# Altium PCB x-IMU3-SA-AX.PcbDoc
Units mm, origin at the board's own origin, x right, y up, seen from the top; angles counter-clockwise.
Board outline 27 x 16 mm, 4 copper layers (Top Layer, Int1 (GND), Int2 (PWR), Bottom Layer), stack 1.369 mm thick; 20 components, 29 nets, 136 pads, 44 vias.
Unrouted connection lines stored in the file: 3.
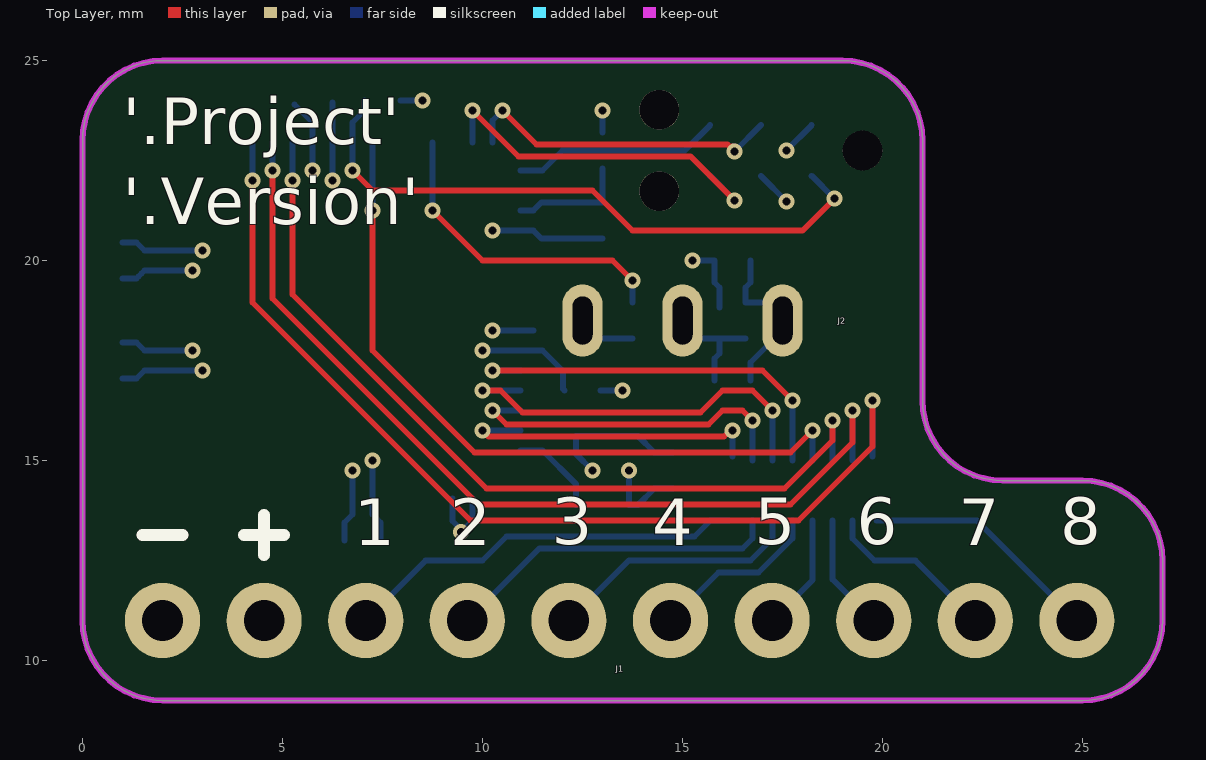
[diagram p0: Top Layer view]
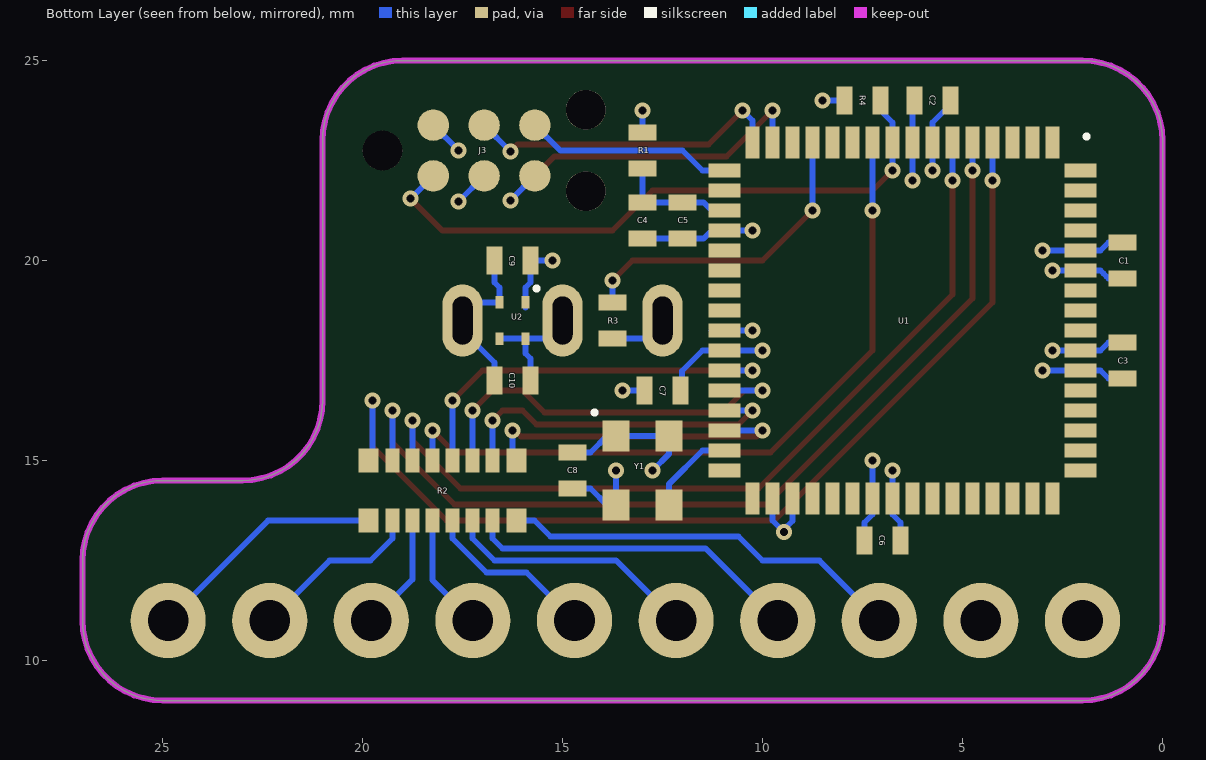
[diagram p1: Bottom Layer view, seen from below]
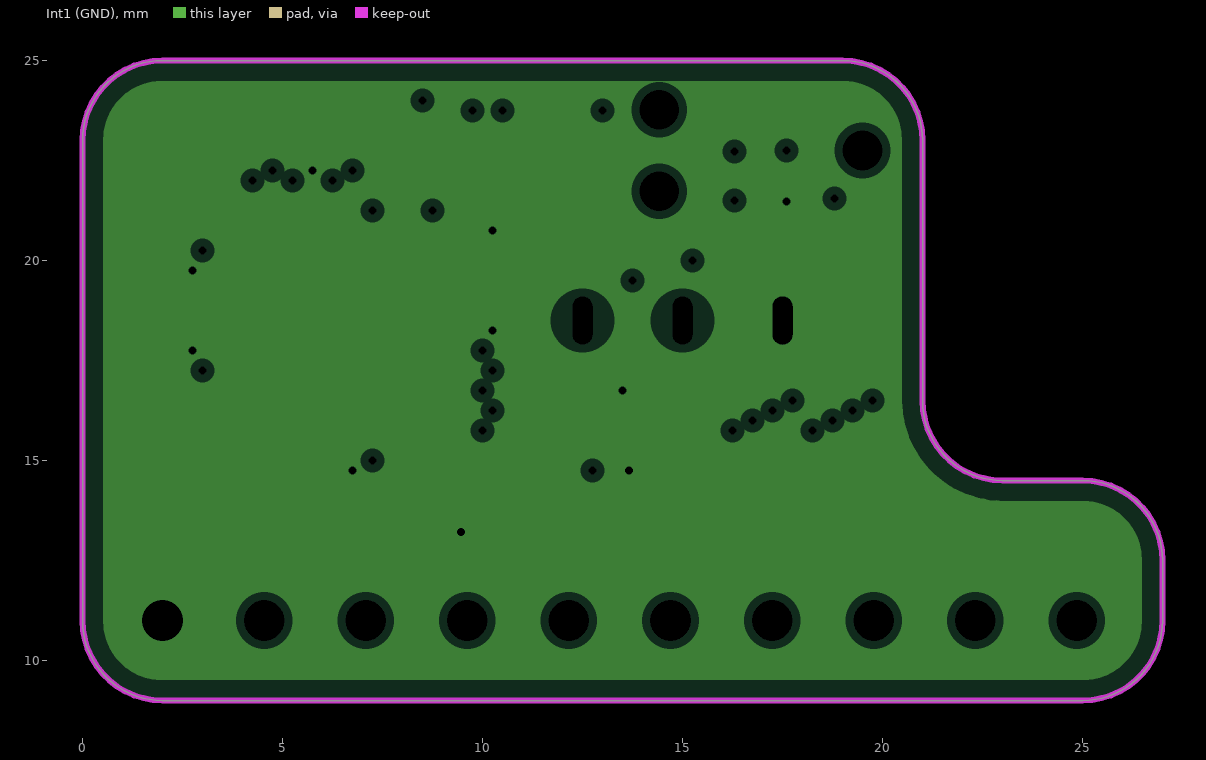
[diagram p2: Int1 (GND), clearances drawn from the general rule]
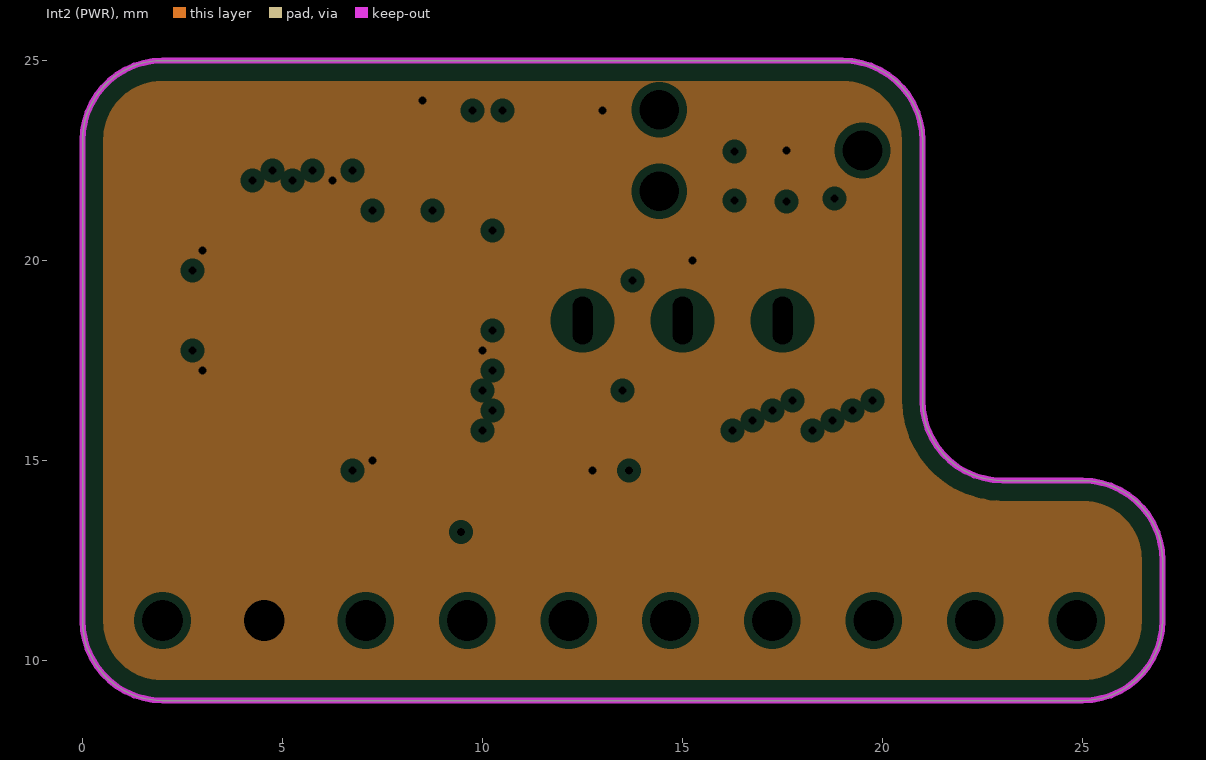
[diagram p3: Int2 (PWR), clearances drawn from the general rule]
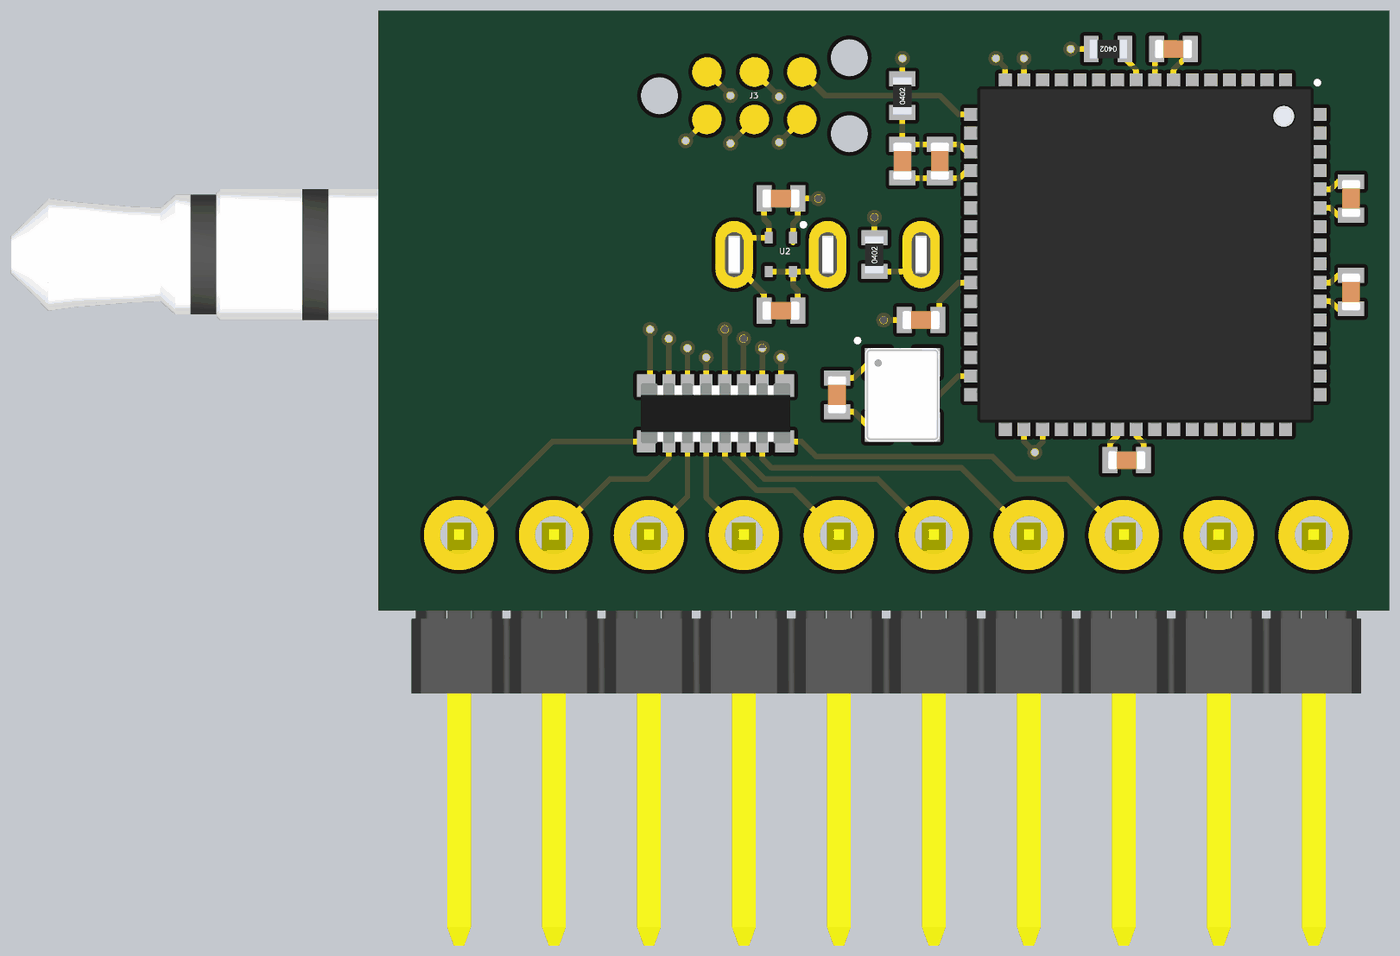
[diagram p4: 3D render of the assembled board from below, using the file's embedded part models]

## Layer stack, top to bottom
Top Solder: solder mask 0.0254, SM-001, Dk 4
Top Layer: signal copper 0.035
Dielectric 1: prepreg 0.1295, PP-017, Dk 4.3
Dielectric 2: prepreg 0.1295, PP-017, Dk 4.3
Int1 (GND): plane copper 0.035, net GND
Dielectric 3: core 0.7112, Core-039, Dk 4.8
Int2 (PWR): plane copper 0.035, net VDD
Dielectric 4: prepreg 0.1295, PP-017, Dk 4.3
Dielectric 5: prepreg 0.1295, PP-017, Dk 4.3
Bottom Layer: signal copper 0.035
Bottom Solder: solder mask 0.0254, SM-001, Dk 4

## Board outline
0,11 0,23 cw(c2,23) 2,25 19,25 cw(c19,23) 21,23 21,16.5 ccw(c23,16.5) 23,14.5 25,14.5 cw(c25,12.5) 27,12.5 27,11 cw(c25,11) 25,9 2,9 cw(c2,11)

## Design rules (kind name [scope] priority, off if disabled: settings)
Clearance [All] p1: gap=0.1 ignorepadtopadclearanceinfootprint=FALSE except(0: Arc-Hole Track-Hole SMDPad-Hole THPad-Hole Via-Hole Fill-Hole Poly-Hole Region-Hole Text-Hole)
DiffPairsRouting [All] p1: maxlimit=0.254 minlimit=0.1 mostfreqgap=0.1 toplayer_minwidth=0.1 toplayer_maxwidth=0.381 toplayer_prefwidth=0.1 bottomlayer_minwidth=0.1 bottomlayer_maxwidth=0.381 bottomlayer_prefwidth=0.1 maxuncoupledlength=12.7
HoleSize [All] p1: absolutevalues=TRUE maxlimit=10 minlimit=0.025 maxpercent=80.000 minpercent=20.000
MinimumSolderMaskSliver [All] p1: minsoldermaskwidth=0
PlaneClearance [All] p1: clearance=0.2
PlaneConnect [All] p1: planeconnectstyle=Direct reliefexpansion=0.508 reliefentries=4 reliefconductorwidth=0.254 reliefairgap=0.254
PolygonConnect [All] p1: thpad.connectstyle=Relief thpad.reliefconductorwidth=0.254 thpad.reliefentries=4 thpad.polygonreliefangle="90 Angle" thpad.airgapwidth=0.1 smdpad.connectstyle=Relief smdpad.reliefconductorwidth=0.254 smdpad.reliefentries=4 smdpad.polygonreliefangle="90 Angle" smdpad.airgapwidth=0.1 via.connectstyle=Direct via.reliefconductorwidth=0.254 via.reliefentries=4 via.polygonreliefangle="90 Angle" via.airgapwidth=0.254
RoutingVias [All] p1: holewidth=0.711 width=1.27 viastyle="Through Hole" minholewidth=0.2 minwidth=0.4 maxholewidth=0.711 maxwidth=1.27
SilkToSolderMaskClearance [IsPad] p1: minsilkscreentomaskgap=0.1 clearancetoexposedcopper=TRUE
SolderMaskExpansion [All] p1: expansion=0.102 istentingtop=FALSE
SupplyNets "Schematic Supply Nets_2" [InNet('GND')] p1: voltage=0.000
SupplyNets "Schematic Supply Nets_1" [InNet('VIN')] p2: voltage=0.000
SupplyNets "Schematic Supply Nets" [InNet('VDD')] p3: voltage=0.000
Width [All] p1: maxlimit=1 minlimit=0.1 preferedwidth=0.1
24 further rules are at their usual default settings.

## Components (designator, comment, footprint, x,y, rotation, side; value= is the part's Value field where it differs from the comment)
C1 "100nF" "Capacitor 0402" 1,20 r90 bottom
C2 "100nF" "Capacitor 0402" 5.75,24 r180 bottom
C3 "100nF" "Capacitor 0402" 1,17.5 r90 bottom
C4 "10uF" "Capacitor 0402" 13,21 r90 bottom
C5 "100nF" "Capacitor 0402" 12,21 r90 bottom
C6 "100nF" "Capacitor 0402" 7,13 r180 bottom
C7 "100nF" "Capacitor 0402" 12.5,16.75 r0 bottom
C8 "100nF" "Capacitor 0402" 14.75,14.75 r90 bottom
C9 "10uF" "Capacitor 0402" 16.25,20 r180 bottom
C10 "10uF" "Capacitor 0402" 16.25,17 r180 bottom
J1 "Molex 90121-0770" "Molex 90121-0770" 2,11 r90 top
J2 "SP-3533-02" SP-3533-02 15,18.5 r180 top
J3 "DNP" "Tag Connect No Legs" 19.5,22.75 r180 bottom
R1 "33R" "Resistor 0402" 13,22.75 r90 bottom
R2 "YC248-FR-07220RL" YC248 18,14.25 r270 bottom
R3 "470R" "Resistor 0402" 13.75,18.5 r90 bottom
R4 "10kR" "Resistor 0402" 7.5,24 r0 bottom
U1 "PIC32MZ0512EFE064-I/MR" QFN-64 6.5,18.5 r270 bottom
U2 "LP5907SNX-3.0" X2SON 16.25,18.5 r270 bottom
Y1 "ECS-2520MV-240-BN-TR" "ECS 2x2.5mm" 13,14.75 r270 bottom

## Footprints (in the part's own frame and the unit in brackets; to place one, negate y for a bottom-side part, rotate by r counter-clockwise, add the part's x,y. Pads: shape width x height; smd on the part's side, far side on the other; paste and mask are expansions set on the pad)
"Capacitor 0402" [mm]
  rect 0.4x0.7 smd: 1(-0.45,0) 2(0.45,0)
  body extent -0.5,-0.25 0.5,0.25, height 0.48
"ECS 2x2.5mm" [mm]
  rect 0.78x0.68 smd: 1(-0.865,-0.665) 2(0.865,-0.665) 3(0.865,0.665) 4(-0.865,0.665)
  silkscreen extent -1.5,-1.25 -1.4,-1.15, body extent -1.25,-1 1.25,1, height 0.82
"Molex 90121-0770" [mil]
  round 74 hole 40: 1(0,0) 2(0,-100) 3(0,-200) 4(0,-300) 5(0,-400) 6(0,-500) 7(0,-600) 8(0,-700) 9(0,-800) 10(0,-900)
  body extent -433,-950 13,50, height 142
QFN-64 [mm]
  rect 0.8x0.35 smd: 1(-4.45,3.75) 2(-4.45,3.25) 3(-4.45,2.75) 4(-4.45,2.25) 5(-4.45,1.75) 6(-4.45,1.25) 7(-4.45,0.75) 8(-4.45,0.25) 9(-4.45,-0.25) 10(-4.45,-0.75) 11(-4.45,-1.25) 12(-4.45,-1.75) 13(-4.45,-2.25) 14(-4.45,-2.75) 15(-4.45,-3.25) 16(-4.45,-3.75) 33(4.45,-3.75) 34(4.45,-3.25) 35(4.45,-2.75) 36(4.45,-2.25) 37(4.45,-1.75) 38(4.45,-1.25) 39(4.45,-0.75) 40(4.45,-0.25) 41(4.45,0.25) 42(4.45,0.75) 43(4.45,1.25) 44(4.45,1.75) 45(4.45,2.25) 46(4.45,2.75) 47(4.45,3.25) 48(4.45,3.75)
  rect 0.35x0.8 smd: 17(-3.75,-4.45) 18(-3.25,-4.45) 19(-2.75,-4.45) 20(-2.25,-4.45) 21(-1.75,-4.45) 22(-1.25,-4.45) 23(-0.75,-4.45) 24(-0.25,-4.45) 25(0.25,-4.45) 26(0.75,-4.45) 27(1.25,-4.45) 28(1.75,-4.45) 29(2.25,-4.45) 30(2.75,-4.45) 31(3.25,-4.45) 32(3.75,-4.45) 49(3.75,4.45) 50(3.25,4.45) 51(2.75,4.45) 52(2.25,4.45) 53(1.75,4.45) 54(1.25,4.45) 55(0.75,4.45) 56(0.25,4.45) 57(-0.25,4.45) 58(-0.75,4.45) 59(-1.25,4.45) 60(-1.75,4.45) 61(-2.25,4.45) 62(-2.75,4.45) 63(-3.25,4.45) 64(-3.75,4.45)
  silkscreen extent -4.65,4.55 -4.55,4.65, body extent -4.52,-4.52 4.52,4.52, height 0.9
"Resistor 0402" [mm]
  rect 0.4x0.7 smd: 1(-0.45,0) 2(0.45,0)
  body extent -0.51,-0.25 0.49,0.25, height 0.34
SP-3533-02 [mm]
  oval 1x1.8 hole 0.5 slot 1.2 at 90 deg: R(0,0) S(-2.5,0) T(2.5,0)
  body extent -21.85,-2.5 4.75,2.5, height 5
"Tag Connect No Legs" [mil]
  round 31 smd paste-99999: 1(50,-25) 2(50,25) 3(100,-25) 4(100,25) 5(150,-25) 6(150,25)
  round 39 hole 39 unplated: Pin(0,0) Pin(200,-40) Pin(200,40)
X2SON [mm]
  rect 0.31x0.21 smd: 1(-0.455,0.325) 2(-0.455,-0.325) 3(0.455,-0.325) 4(0.455,0.325)
  silkscreen extent -0.85,0.55 -0.75,0.65, body extent -0.5,-0.5 0.5,0.5, height 0.4
YC248 [mm]
  rect 0.6x0.5 smd: 1(-0.75,1.85) 8(-0.75,-1.85) 9(0.75,-1.85) 16(0.75,1.85)
  rect 0.6x0.35 smd: 2(-0.75,1.25) 3(-0.75,0.75) 4(-0.75,0.25) 5(-0.75,-0.25) 6(-0.75,-0.75) 7(-0.75,-1.25) 10(0.75,-1.25) 11(0.75,-0.75) 12(0.75,-0.25) 13(0.75,0.25) 14(0.75,0.75) 15(0.75,1.25)
  body extent -0.8,-2 0.8,2, height 0.45

## Part data
C1 C2 C3 C4 C5 C6 C7 C8 C9 C10: library part Capacitor
J3: library part "MPLAB ICSP"
R1 R3 R4: library part Resistor
R2: library part "Resistor Array 8"
U1: library part PIC32MZ2048EFH064
U2: library part LP5907SNX-X.X
Y1: library part Oscillator

## Via types
v1: diameter 0.4, hole 0.2, Top Layer to Bottom Layer, tented both sides, 44 vias

## Nets (pads, with @x,y where several pads share a name; then routed paths per layer and width w, separated by ;. In a path a pad name is that pad's centre, name@x,y a point inside that pad or via, vN(x,y) a via of type N, cw(c..) or ccw(c..) an arc to the next point about the centre after c; other vN are vias at no path point)
AVDD: C4.2 C5.2 R1.1 U1.19 | length 3
  Bottom Layer w0.15: U1.19 11.272,21.25 11.472,21.45 C5.2 C4.2 R1.1
CH1: R2.1 U1.30 | length 8
  Top Layer w0.15: v1(10,15.75) 10.15,15.6 16.037,15.6 16.187,15.75 v1(16.25,15.75)
  Bottom Layer w0.15: v1(10,15.75) U1.30 ; R2.1@16.25,15.1 v1(16.25,15.75)
"CH1 R": J1.3 R2.16 | length 10.1
  Bottom Layer w0.15: J1.3 8.58,12.5 10,12.5 10.6,13.1 15.3,13.1 15.7,13.5 R2.16
CH2: R2.2 U1.29 | length 8.6
  Top Layer w0.15: v1(10.25,16.25) 10.6,15.9 15.65,15.9 16,16.25 16.5,16.25 v1(16.75,16)
  Bottom Layer w0.15: v1(10.25,16.25) U1.29 ; R2.2 v1(16.75,16)
"CH2 R": J1.4 R2.15 | length 8.4
  Bottom Layer w0.15: J1.4 11.42,12.8 16.5,12.8 16.75,13.05 R2.15
CH3: R2.3 U1.28 | length 10.1
  Top Layer w0.15: v1(10,16.75) 10.45,16.75 11,16.2 15.45,16.2 16,16.75 16.75,16.75 v1(17.25,16.25)
  Bottom Layer w0.15: v1(10,16.75) U1.28 ; R2.3 v1(17.25,16.25)
"CH3 R": J1.5 R2.14 | length 6.4
  Bottom Layer w0.15: J1.5 13.66,12.5 16.7,12.5 17.25,13.05 R2.14
CH4: R2.4 U1.27 | length 10
  Top Layer w0.15: v1(10.25,17.25) 17,17.25 v1(17.75,16.5)
  Bottom Layer w0.15: v1(10.25,17.25) U1.27 ; R2.4 v1(17.75,16.5)
"CH4 R": J1.6 R2.13 | length 4.3
  Bottom Layer w0.15: J1.6 15.9,12.2 16.9,12.2 17.75,13.05 R2.13
CH5: R2.5 U1.10 | length 18.2
  Top Layer w0.15: v1(7.25,21.25) 7.25,17.75 9.8,15.2 17.7,15.2 v1(18.25,15.75)
  Bottom Layer w0.15: v1(7.25,21.25) U1.10 ; R2.5 v1(18.25,15.75)
"CH5 R": J1.7 R2.12 | length 2.9
  Bottom Layer w0.15: J1.7 18.25,12.01 R2.12
CH6: R2.6 U1.6 | length 21.3
  Top Layer w0.15: v1(5.25,22) 5.25,19.15 10.1,14.3 17.55,14.3 18.75,15.5 v1(18.75,16)
  Bottom Layer w0.15: v1(5.25,22) U1.6 ; R2.6 v1(18.75,16)
"CH6 R": J1.8 R2.11 | length 2.9
  Bottom Layer w0.15: R2.11 18.75,12.03 J1.8
CH7: R2.7 U1.5 | length 23.2
  Top Layer w0.15: v1(4.75,22.25) 4.75,19.05 9.9,13.9 17.7,13.9 19.25,15.45 v1(19.25,16.25)
  Bottom Layer w0.15: v1(4.75,22.25) U1.5 ; R2.7 v1(19.25,16.25)
"CH7 R": J1.9 R2.10 | length 4.4
  Bottom Layer w0.15: R2.10 19.25,13.05 19.8,12.5 20.82,12.5 J1.9
CH8: R2.8 U1.4 | length 25.1
  Top Layer w0.15: v1(4.25,22) 4.25,18.95 9.7,13.5 17.9,13.5 19.75,15.35 v1(19.75,16.5)
  Bottom Layer w0.15: v1(4.25,22) U1.4 ; R2.8@19.75,15.1 v1(19.75,16.5)
"CH8 R": J1.10 R2.9 | length 6
  Bottom Layer w0.15: R2.9 22.36,13.5 J1.10
CLKI: U1.31 Y1.3 | length 2.3
  Bottom Layer w0.15: U1.31 11.5,15.25 12.335,14.415 Y1.3
Debug: J3.6 U1.17 | length 5.2
  Bottom Layer w0.15: U1.17 11.5,22.25 12,22.75 15.055,22.75 J3.6
GND: C1.1 C2.2 C3.2 C4.1 C5.1 C6.2 C7.2 C8.1 C9.1 C10.1 J1.1 J2.S J3.3 U1.7 U1.20 U1.25 U1.34 U1.35 U1.40 U1.55 U1.59 U2.2 Y1.2 | length 20.5
  Bottom Layer w0.15: C3.2 1.35,17.95 1.55,17.75 U1.55 v1(2.75,17.75) ; C1.1 1.35,19.55 1.475,19.675 ; 1.4,19.6 1.475,19.675 ; v1(2.75,19.75) U1.59 1.55,19.75 1.475,19.675 ; C2.2@5.3,23.9 5.75,23.45 U1.7 v1(5.75,22.25) ; C6.2 6.55,13.45 6.75,13.65 U1.40 v1(6.75,14.75) ; U1.35 9.25,13.487 9.46,13.277 v1(9.46,13.21) ; v1@9.5,13.25 9.75,13.5 U1.34 ; v1(10.25,18.25) U1.25 U1.25@11.272,18.25 ; v1(10.25,20.75) U1.20 11.272,20.75 11.472,20.55 C5.1 C4.1 ; C7.2 v1(13.5,16.75) ; v1(13.665,14.75) Y1.2 13.885,13.885 14.3,14.3 C8.1 ; C10.1 16.7,17.45 J2.S@17.5,18.25 ; C9.1 16.7,19.45 16.575,19.325 U2.2 17.045,18.955 J2.S ; J3.3 v1(17.6,21.475)
MCLR: J3.1 R4.1 U1.9 | length 15.7
  Top Layer w0.15: v1(6.75,22.25) 7.25,21.75 12.75,21.75 13.75,20.75 18.005,20.75 v1(18.8,21.545)
  Bottom Layer w0.15: v1(6.75,22.25) U1.9 6.75,23.45 7.05,23.75 R4.1 ; J3.1 v1(18.8,21.545)
PGEC: J3.5 U1.15 | length 9.1
  Top Layer w0.15: v1(9.75,23.75) 10.9,22.6 15.205,22.6 v1(16.3,21.505)
  Bottom Layer w0.15: U1.15 v1(9.75,23.75) ; J3.5 v1(16.3,21.505)
PGED: J3.4 U1.16 | length 8
  Top Layer w0.15: v1(10.5,23.75) 11.35,22.9 16.125,22.9 16.175,22.85 v1@16.3,22.85
  Bottom Layer w0.15: U1.16 10.25,23.5 v1(10.5,23.75) ; v1(16.3,22.725) J3.4
TX: R3.2 U1.13 | length 8
  Top Layer w0.15: v1(8.75,21.25) 10,20 13.25,20 v1(13.75,19.5)
  Bottom Layer w0.15: v1(8.75,21.25) U1.13 ; R3.2 v1(13.75,19.5)
"TX R": J2.T R3.1 | length 1.4
  Bottom Layer w0.15: J2.T 12.95,18.05 R3.1
U1RX: U1.22
U2RX: U1.21
VDD: C1.2 C2.1 C3.1 C6.1 C7.1 C8.2 C9.2 J1.2 J3.2 R1.2 R4.2 U1.8 U1.26 U1.39 U1.54 U1.60 U2.1 Y1.1 Y1.4 | length 18.3
  Bottom Layer w0.15: C3.1 1.35,17.05 1.55,17.25 U1.54 v1(3,17.25) ; C1.2 1.35,20.45 1.55,20.25 U1.60 v1(3,20.25) ; v1(6.25,22) U1.8 C2.1@6.25,23.95 ; v1(7.25,15) U1.39 7.25,13.65 7.45,13.45 C6.1 ; R4.2 v1(8.5,24) ; v1(10,17.75) U1.26 11.5,17.75 12.013,17.237 12.013,16.787 C7.1 ; v1(12.75,14.75) 12.335,15.165 Y1.4 Y1.1 13.885,15.615 14.3,15.2 C8.2 ; R1.2 v1(13,23.75) ; v1(15.25,20) C9.2 15.8,19.45 15.925,19.325 U2.1 U2.1@15.925,18.825 ; v1(17.6,22.755) J3.2
VIN: C10.2 J2.R U2.3 U2.4 | length 2.9
  Bottom Layer w0.15: J2.R 15.455,18.045 U2.4 ; C10.2 15.8,17.55 15.925,17.675 U2.4 ; U2.3 U2.4
pads on no net: J3.Pin U1.1 U1.2 U1.3 U1.11 U1.12 U1.14 U1.18 U1.23 U1.24 U1.32 U1.33 U1.36 U1.37 U1.38 U1.41 U1.42 U1.43 U1.44 U1.45 U1.46 U1.47 U1.48 U1.49 U1.50 U1.51 U1.52 U1.53 U1.56 U1.57 U1.58 U1.61 U1.62 U1.63 U1.64

## Polygon pours and split planes (outlines as drawn)
GND on Int1 (GND) (split plane): 2,24.49 19,24.49 19.015,24.491 19.167,24.482 19.332,24.454 19.493,24.408 19.647,24.344 19.794,24.263 19.93,24.166 20.055,24.055 20.166,23.93 20.263,23.794 20.344,23.647 20.408,23.493 20.454,23.332 20.482,23.167 20.491,23.015 20.49,23 20.49,16.5 20.49,16.499 20.499,16.281 20.528,16.064 20.575,15.85 20.641,15.641 20.725,15.439 20.826,15.245 20.944,15.06 21.077,14.886 21.225,14.725 21.386,14.577 21.56,14.444 21.745,14.326 21.939,14.225 22.141,14.141 22.35,14.075 22.564,14.028 22.781,13.999 22.999,13.99 23,13.99 25,13.99 25.015,13.991 25.167,13.982 25.332,13.954 25.493,13.908 25.647,13.844 25.794,13.763 25.93,13.666 26.055,13.555 26.166,13.43 26.263,13.294 26.344,13.147 26.408,12.993 26.454,12.832 26.482,12.667 26.491,12.515 26.49,12.5 26.49,11 26.491,10.985 26.482,10.833 26.454,10.668 26.408,10.507 26.344,10.353 26.263,10.206 26.166,10.07 26.055,9.945 25.93,9.834 25.794,9.737 25.647,9.656 25.493,9.592 25.332,9.546 25.167,9.518 25.015,9.509 25,9.51 2,9.51 1.985,9.509 1.833,9.518 1.668,9.546 1.507,9.592 1.353,9.656 1.206,9.737 1.07,9.834 0.945,9.945 0.834,10.07 0.737,10.206 0.656,10.353 0.592,10.507 0.546,10.668 0.518,10.833 0.509,10.985 0.51,11 0.51,23 0.509,23.015 0.518,23.167 0.546,23.332 0.592,23.493 0.656,23.647 0.737,23.794 0.834,23.93 0.945,24.055 1.07,24.166 1.206,24.263 1.353,24.344 1.507,24.408 1.668,24.454 1.833,24.482 1.985,24.491
VDD on Int2 (PWR) (split plane): 2,24.49 19,24.49 19.015,24.491 19.167,24.482 19.332,24.454 19.493,24.408 19.647,24.344 19.794,24.263 19.93,24.166 20.055,24.055 20.166,23.93 20.263,23.794 20.344,23.647 20.408,23.493 20.454,23.332 20.482,23.167 20.491,23.015 20.49,23 20.49,16.5 20.49,16.499 20.499,16.281 20.528,16.064 20.575,15.85 20.641,15.641 20.725,15.439 20.826,15.245 20.944,15.06 21.077,14.886 21.225,14.725 21.386,14.577 21.56,14.444 21.745,14.326 21.939,14.225 22.141,14.141 22.35,14.075 22.564,14.028 22.781,13.999 22.999,13.99 23,13.99 25,13.99 25.015,13.991 25.167,13.982 25.332,13.954 25.493,13.908 25.647,13.844 25.794,13.763 25.93,13.666 26.055,13.555 26.166,13.43 26.263,13.294 26.344,13.147 26.408,12.993 26.454,12.832 26.482,12.667 26.491,12.515 26.49,12.5 26.49,11 26.491,10.985 26.482,10.833 26.454,10.668 26.408,10.507 26.344,10.353 26.263,10.206 26.166,10.07 26.055,9.945 25.93,9.834 25.794,9.737 25.647,9.656 25.493,9.592 25.332,9.546 25.167,9.518 25.015,9.509 25,9.51 2,9.51 1.985,9.509 1.833,9.518 1.668,9.546 1.507,9.592 1.353,9.656 1.206,9.737 1.07,9.834 0.945,9.945 0.834,10.07 0.737,10.206 0.656,10.353 0.592,10.507 0.546,10.668 0.518,10.833 0.509,10.985 0.51,11 0.51,23 0.509,23.015 0.518,23.167 0.546,23.332 0.592,23.493 0.656,23.647 0.737,23.794 0.834,23.93 0.945,24.055 1.07,24.166 1.206,24.263 1.353,24.344 1.507,24.408 1.668,24.454 1.833,24.482 1.985,24.491

## Keep-outs
Keep-Out Layer:
  the board outline again, w0.15

## Silkscreen, mask and mechanical layers (free items; w line width, h text height)
Top Overlay:
  lines w0.3: 1.5,13.142 2.5,13.142 ; 4.04,13.142 5.04,13.142 ; 4.54,12.642 4.54,13.642
  text "'.Project'" at 1,22.523 h2
  text "'.Version'" at 1,20.522 h2
  text "3" at 11.735,12.522 h2
  text "5" at 16.81,12.522 h2
  text "6" at 19.353,12.522 h2
  text "8" at 24.439,12.523 h2
  text "1" at 6.799,12.5 h2
  text "2" at 9.19,12.5 h2
  text "4" at 14.24,12.5 h2
  text "7" at 21.901,12.5 h2